# Altium PCB PCB_monitoring_Bott_Back.PcbDoc
Units mm, origin at the board's own origin, x right, y up, seen from the top; angles counter-clockwise.
Board outline 180 x 42.5 mm, 2 copper layers (Top Layer, Bottom Layer), stack 1.571 mm thick; 33 components, 80 nets, 198 pads, 3 vias.
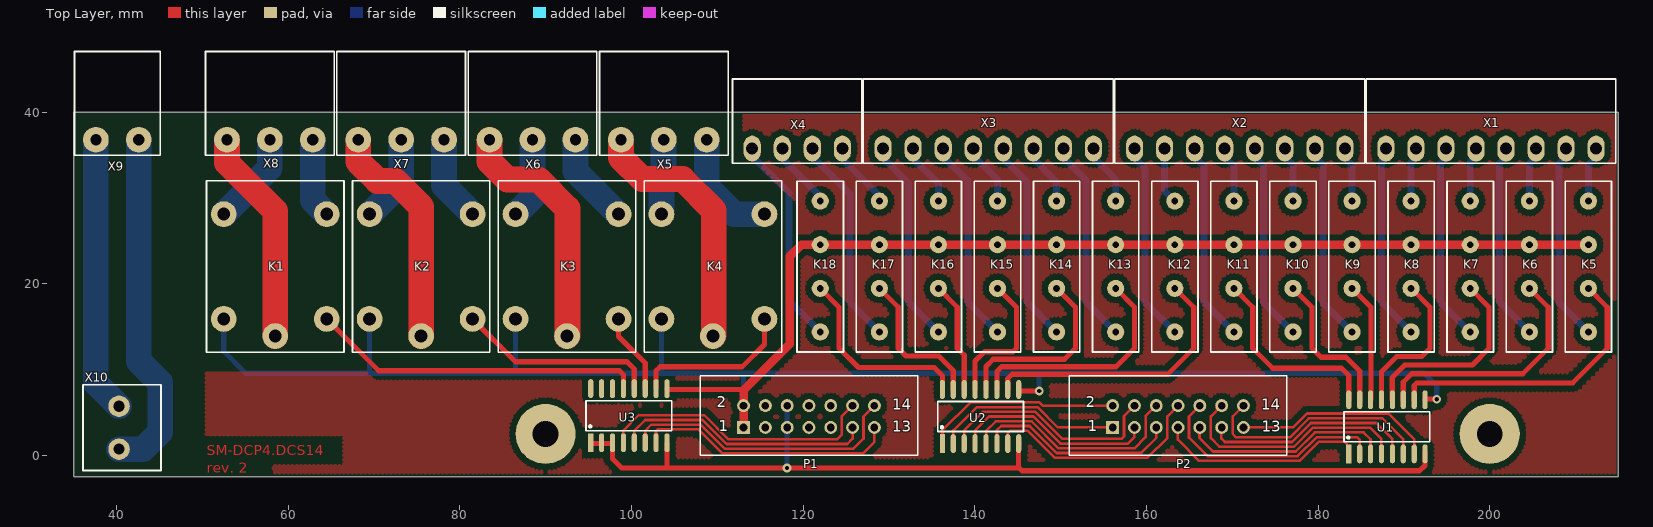
[diagram p0: Top Layer view]
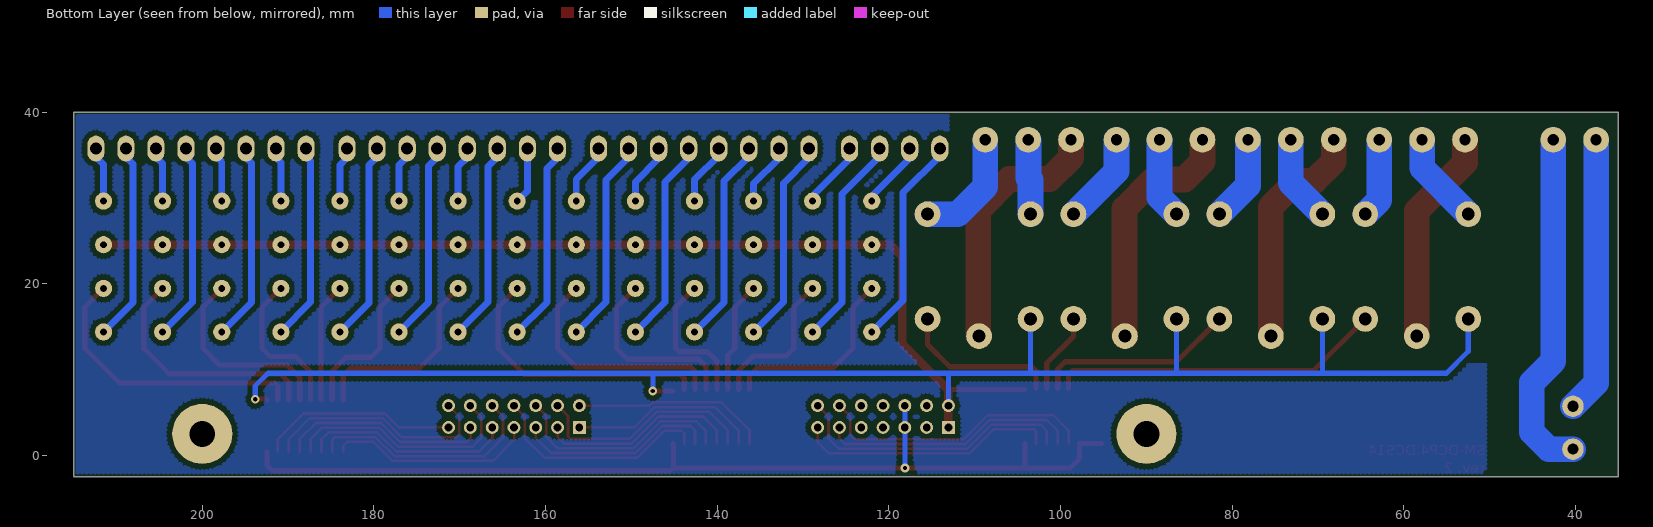
[diagram p1: Bottom Layer view, seen from below]

## Layer stack, top to bottom
Top Solder: solder mask 0.0102, Solder Resist, Dk 3.5
Top Layer: signal copper 0.0356
Dielectric 1: dielectric 1.5, FR-4, Dk 4.8
Bottom Layer: signal copper 0.0356
Bottom Solder: solder mask 0.0102, Solder Resist, Dk 3.5

## Board outline
35,-2.5 215,-2.5 215,40 35,40

## Design rules (kind name [scope] priority, off if disabled: settings)
Clearance Clearance_3 [InPolygon And InNetClass('GND')] p1: gap=0.4
Clearance Clearance_2 [InPolygon And OnLayer('Bottom Layer')] p2: gap=0.6
Clearance Clearance_1 [InPolygon And OnLayer('Top Layer')] p3: gap=0.7
Clearance [All] p4: gap=0.25
ComponentClearance [All] p1: gap=0 collisioncheckmode=3 verticalgap=0 showdistances=FALSE
Height [All] p1: minheight=0 maxheight=30 prefheight=12.7
HoleSize [All] p1: absolutevalues=TRUE maxlimit=5 minlimit=0.2 maxpercent=80.000 minpercent=20.000
HoleToHoleClearance [All] p1: gap=0.25 allowstackedmicrovias=TRUE
MinimumSolderMaskSliver [All] p1: minsoldermaskwidth=0
PlaneClearance [All] p1: clearance=0.5
PlaneConnect [All] p1: planeconnectstyle=Relief reliefexpansion=0.5 reliefentries=4 reliefconductorwidth=0.3 reliefairgap=0.25
PolygonConnect [All] p1: connectstyle=Relief reliefconductorwidth=0.4 reliefentries=4 polygonreliefangle="90 Angle" airgapwidth=0.4
RoutingCorners [All] p1: cornerstyle=45-Degree minsetback=2 maxsetback=2
RoutingVias [All] p1: holewidth=0.8 width=1.3 viastyle="Through Hole" minholewidth=0.3 minwidth=0.8 maxholewidth=5 maxwidth=7
SilkToBoardRegionClearance [All] p1 off:
SilkToSilkClearance [All] p1: silktosilkclearance=0
SilkToSolderMaskClearance [IsPad] p1: minsilkscreentomaskgap=0 clearancetoexposedcopper=TRUE
SolderMaskExpansion [All] p1: expansion=0.1
Width [All] p1: maxlimit=4 minlimit=0.25 preferedwidth=0.5 minimp=50.000000 maximp=50.000000 favimp=50.000000
19 further rules are at their usual default settings.

## Components (designator, comment, footprint, x,y, rotation, side; value= is the part's Value field where it differs from the comment)
K1 "JQC-3F-DC12VH-15A" BS-115C-12A 58.5,22 r90 top
K2 "JQC-3F-DC12VH-15A" BS-115C-12A 75.5,22 r90 top
K3 "JQC-3F-DC12VH-15A" BS-115C-12A 92.5,22 r90 top
K4 "JQC-3F-DC12VH-15A" BS-115C-12A 109.5,22 r90 top
K5 "BRS-1A12" R_BRS 211.5,22 r270 top
K6 "BRS-1A12" R_BRS 204.615,22 r270 top
K7 "BRS-1A12" R_BRS 197.731,22 r270 top
K8 "BRS-1A12" R_BRS 190.846,22 r270 top
K9 "BRS-1A12" R_BRS 183.962,22 r270 top
K10 "BRS-1A12" R_BRS 177.077,22 r270 top
K11 "BRS-1A12" R_BRS 170.192,22 r270 top
K12 "BRS-1A12" R_BRS 163.308,22 r270 top
K13 "BRS-1A12" R_BRS 156.423,22 r270 top
K14 "BRS-1A12" R_BRS 149.538,22 r270 top
K15 "BRS-1A12" R_BRS 142.654,22 r270 top
K16 "BRS-1A12" R_BRS 135.769,22 r270 top
K17 "BRS-1A12" R_BRS 128.885,22 r270 top
K18 "BRS-1A12" R_BRS 122,22 r270 top
P1 "BH-14" BH-14 120.686,4.524 r0 top
P2 "BH-14" BH-14 163.686,4.524 r0 top
U1 "ULN2003A" SO-16_N 188.025,3.325 r90 top
U2 "ULN2003A" SO-16_N 140.675,4.525 r90 top
U3 "ULN2003A" SO-16_N 99.7,4.625 r90 top
X1 "15EDGRC-3.5-08P" MC_3.5_8 200.15,35.75 r180 top
X2 "15EDGRC-3.5-08P" MC_3.5_8 170.875,35.75 r180 top
X3 "15EDGRC-3.5-08P" MC_3.5_8 141.575,35.75 r180 top
X4 "15EDGRC-3.5-04P" MC_3.5_4 119.325,35.75 r180 top
X5 "2EDGR-5.0-03P" 2EDGR-5.0-03P 103.775,36.775 r0 top
X6 "2EDGR-5.0-03P" 2EDGR-5.0-03P 88.475,36.775 r0 top
X7 "2EDGR-5.0-03P" 2EDGR-5.0-03P 73.175,36.775 r0 top
X8 "2EDGR-5.0-03P" 2EDGR-5.0-03P 57.875,36.775 r0 top
X9 "2EDGR-5.0-02P" 2EDGR-5.0-02P 40.1,36.775 r0 top
X10 "DG300" "5mm 2" 40.3,3.225 r270 top

## Footprints (in the part's own frame and the unit in brackets; to place one, negate y for a bottom-side part, rotate by r counter-clockwise, add the part's x,y. Pads: shape width x height; smd on the part's side, far side on the other; paste and mask are expansions set on the pad)
2EDGR-5.0-02P [mm]
  round 3 hole 1.3: 1(-2.5,0) 2(2.5,0)
  silkscreen extent -5,-1.82 5,10.28, body extent -5,-1.75 5,10.25, height 8.47
2EDGR-5.0-03P [mm]
  round 3 hole 1.3: 1(-5,0) 2(0,0) 3(5,0)
  silkscreen extent -7.5,-1.82 7.5,10.28, body extent -7.5,-1.75 7.5,10.25, height 8.47
"5mm 2" [mm]
  round 2.5 hole 1.3: 1(-2.5,0) 2(2.5,0)
  silkscreen extent -5,-4.2 5,4.9, body extent -5,-4 5,5, height 12.6
BH-14 [mm] "Connector IDC"
  rect 1.5x1.5 hole 0.9: 1(-7.62,-1.27)
  round 1.5 hole 0.9: 2(-7.62,1.27) 3(-5.08,-1.27) 4(-5.08,1.27) 5(-2.54,-1.27) 6(-2.54,1.27) 7(0,-1.27) 8(0,1.27) 9(2.54,-1.27) 10(2.54,1.27) 11(5.08,-1.27) 12(5.08,1.27) 13(7.62,-1.27) 14(7.62,1.27)
  silkscreen extent -12.68,-4.5 12.68,4.75, body extent -12.69,-4.4 12.69,4.7, height 9.3
BS-115C-12A [mm]
  round 3 hole 1.5: 1(-6.1,6) 2(-6.1,-6) 3(-8.1,0) 4(6.1,6) 5(6.1,-6)
  silkscreen extent -10,-8 10,8, body extent -9.75,-7.95 9.75,7.95, height 15
MC_3.5_4 [mm]
  oval 2x3 hole 1.4: 1(-5.25,0) 2(-1.75,0) 3(1.75,0) 4(5.25,0)
  silkscreen extent -7.55,-8.1 7.55,1.7, body extent -7.4,-8 7.4,1.2, height 7.2
MC_3.5_8 [mm]
  oval 2x3 hole 1.4: 1(-12.25,0) 2(-8.75,0) 3(-5.25,0) 4(-1.75,0) 5(1.75,0) 6(5.25,0) 7(8.75,0) 8(12.25,0)
  silkscreen extent -14.55,-8.1 14.55,1.7, body extent -14.4,-7.95 14.4,1.25, height 7.2
R_BRS [mm]
  round 2 hole 0.8: 1(-7.62,0) 3(-2.54,0) 5(2.54,0) 7(7.62,0)
  silkscreen extent -9.95,-2.7 9.95,2.7, body extent -9.52,-2.56 9.53,2.55, height 7.8
SO-16_N [mm] "16-Pin Small Outline Integrated Circuit 1.27 mm Pitch, IPC Medium Density"
  rect 2.2x0.6 smd: 1(-3.15,4.445)
  oval 2.2x0.6 smd: 2(-3.15,3.175) 3(-3.15,1.905) 4(-3.15,0.635) 5(-3.15,-0.635) 6(-3.15,-1.905) 7(-3.15,-3.175) 8(-3.15,-4.445) 9(3.15,-4.445) 10(3.15,-3.175) 11(3.15,-1.905) 12(3.15,-0.635) 13(3.15,0.635) 14(3.15,1.905) 15(3.15,3.175) 16(3.15,4.445)
  silkscreen extent -1.75,-5 1.75,5, body extent -3,-5.1 3,5.1, height 1.7

## Part data
K1 K2 K3 K4: library part JQC-3F-DC12VH-7A, "7A 240Vac 1 pole Slim relay"
K5 K6 K7 K8 K9 K10 K11 K12 K13 K14 K15 K16 K17 K18: "1A, 10Vdc, 1 pole, SIP terminal"
P1 P2: "IDC/BH"
U1 U2 U3: "Darlington Transistor Arrays"
X1 X2 X3: library part MC_3.5_8, "Connector 3.5mm"
X4: library part MC_3.5_4, "Connector 3.5mm"
X5 X6 X7 X8 X9: "Connector 5mm"
X10: library part DG300_2pin, "Connector 5mm"

## Free pads (board coordinates)
  round 7 hole 3: 0(90,2.5) 0(200,2.5)

## Via types
v1: diameter 1, hole 0.5, Top Layer to Bottom Layer, 3 vias

## Nets (pads, with @x,y where several pads share a name; then routed paths per layer and width w, separated by ;. In a path a pad name is that pad's centre, name@x,y a point inside that pad or via, vN(x,y) a via of type N, cw(c..) or ccw(c..) an arc to the next point about the centre after c; other vN are vias at no path point)
12V_B: K1.1 K2.1 K3.1 K4.1 K5.3 K6.3 K7.3 K8.3 K9.3 K10.3 K11.3 K12.3 K13.3 K14.3 K15.3 K16.3 K17.3 K18.3 P1.1 P1.2 U1.9 U2.9 U3.9 | length 301.8
  Top Layer w0.6: U3.9@104.131,7.674 113.066,7.674 113.066,7.591 ; U2.9@145.15,7.5 v1(147.5,7.5) ; U1.9 192.545,6.55 v1(193.825,6.55)
  Top Layer w1: P1.1 P1.2 113.066,7.591 118.45,12.975 118.45,23.2 119.775,24.525 121.985,24.525 K18.3 K17.3 K16.3 K15.3 K14.3 K13.3 K12.3 K11.3 K10.3 K9.3 K8.3 K7.3 K6.3 K5.3
  Bottom Layer w0.6: K1.1 52.5,12.125 55.05,9.575 69.65,9.575 ; K2.1 69.5,9.725 69.65,9.575 ; K3.1 86.5,9.775 86.7,9.575 ; K4.1 103.5,9.575 ; P1.2 113.066,9.566 113.075,9.575 ; v1(147.5,7.5) 147.5,9.575 ; v1(193.825,6.55) 193.825,8.1 192.35,9.575 147.5,9.575 ; 69.65,9.575 86.7,9.575 ; 86.7,9.575 103.5,9.575 ; 103.5,9.575 113.075,9.575 ; 113.075,9.575 147.5,9.575
B_OPR1: P1.13 U3.7 | length 30.4
  Top Layer w0.3: U3.7@102.861,1.374 102.861,2.824 103.061,3.024 107.826,3.024 110.626,0.224 126.986,0.224 128.306,1.544 P1.13
B_OPR2: P1.14 U3.6 | length 33.2
  Top Layer w0.3: U3.6@101.591,1.374 101.591,2.854 102.311,3.574 108.054,3.574 110.854,0.774 125.861,0.774 127.036,1.949 127.036,4.524 P1.14
B_OPR3: P1.11 U3.5 | length 30.2
  Top Layer w0.3: U3.5@100.321,1.374 100.321,2.834 101.611,4.124 108.282,4.124 111.082,1.324 125.146,1.324 125.766,1.944 P1.11
B_OPR4: P1.12 U3.4 | length 33
  Top Layer w0.3: U3.4@99.051,1.374 99.051,2.889 100.836,4.674 108.509,4.674 111.309,1.874 123.961,1.874 124.486,2.399 124.486,4.514 P1.12
B_OSR1: P2.13 U1.7 | length 23.3
  Top Layer w0.3: P2.13 177.091,3.254 178.711,4.874 188.211,4.874 191.186,1.899 U1.7@191.186,0.424
B_OSR2: P2.14 U1.6 | length 27.2
  Top Layer w0.3: P2.14 170.061,4.549 170.061,2.499 170.456,2.104 176.719,2.104 178.939,4.324 187.486,4.324 189.916,1.894 U1.6@189.916,0.424
B_OSR3: P2.11 U1.5 | length 24.6
  Top Layer w0.3: P2.11 168.736,3.224 168.736,1.949 169.131,1.554 176.947,1.554 179.167,3.774 186.761,3.774 188.646,1.889 U1.5@188.646,0.424
B_OSR4: P2.12 U1.4 | length 27.5
  Top Layer w0.3: P2.12 167.511,4.539 167.511,1.999 168.506,1.004 177.174,1.004 179.394,3.224 186.036,3.224 187.376,1.884 U1.4@187.376,0.424
B_OSR5: P2.9 U1.3 | length 24.5
  Top Layer w0.3: P2.9 166.186,3.214 166.186,2.049 167.781,0.454 177.402,0.454 179.622,2.674 185.311,2.674 186.106,1.879 U1.3@186.106,0.424
B_OSR6: P2.10 U1.2 | length 27.5
  Top Layer w0.3: P2.10 164.961,4.529 164.961,2.074 167.131,-0.096 177.63,-0.096 179.85,2.124 184.536,2.124 184.836,1.824 U1.2@184.836,0.424
B_OSR7: P2.7 U1.1 | length 24.2
  Top Layer w0.3: P2.7 163.661,3.229 163.661,1.824 166.131,-0.646 177.858,-0.646 180.078,1.574 183.111,1.574 183.566,1.119 U1.1@183.566,0.424
B_OSR8: P2.8 U2.7 | length 26.4
  Top Layer w0.3: U2.7@143.861,1.374 143.861,2.599 144.137,2.875 146.16,2.875 149.311,-0.276 160.111,-0.276 162.436,2.049 162.436,4.544 P2.8
B_OSR9: P2.5 U2.6 | length 23.6
  Top Layer w0.3: U2.6@142.591,1.374 142.591,2.929 143.087,3.425 146.388,3.425 149.539,0.274 159.386,0.274 161.146,2.034 P2.5
B_OSR10: P2.6 U2.5 | length 26.5
  Top Layer w0.3: U2.5@141.321,1.374 141.321,2.834 142.462,3.975 146.616,3.975 149.767,0.824 158.611,0.824 159.911,2.124 159.911,4.559 P2.6
B_OSR11: P2.3 U2.4 | length 23.5
  Top Layer w0.3: U2.4@140.051,1.374 140.051,2.889 141.687,4.525 146.843,4.525 149.994,1.374 157.836,1.374 158.586,2.124 158.586,3.234 P2.3
B_OSR12: P2.4 U2.3 | length 26.6
  Top Layer w0.3: U2.3@138.781,1.374 138.781,2.944 140.912,5.075 147.071,5.075 150.222,1.924 157.086,1.924 157.386,2.224 157.386,4.574 P2.4
B_OSR13: P2.1 U2.2 | length 22.2
  Top Layer w0.3: U2.2@137.511,1.374 137.511,2.899 140.237,5.625 147.299,5.625 149.67,3.254 P2.1
B_OSR14: P2.2 U2.1 | length 22.9
  Top Layer w0.3: U2.1@136.241,1.374 136.241,2.929 139.487,6.175 147.527,6.175 147.908,5.794 P2.2
C_OPR1: K4.2 U3.10 | length 18.9
  Top Layer w0.6: U3.10 102.875,9.85 103.35,10.325 112.9,10.325 115.5,12.925 K4.2
C_OPR2: K3.2 U3.11 | length 9.4
  Top Layer w0.6: K3.2 98.5,13.85 101.605,10.745 U3.11
C_OPR3: K2.2 U3.12 | length 23.5
  Top Layer w0.6: K2.2 86.5,10.9 99.5,10.9 100.335,10.065 U3.12
C_OPR4: K1.2 U3.13 | length 38.9
  Top Layer w0.6: K1.2 70.55,9.85 98.625,9.85 99.075,9.4 99.065,9.39 U3.13
C_OSR1: K5.5 U1.10 | length 33.9
  Top Layer w0.6: U1.10 191.2,8.15 191.5,8.45 209.675,8.45 213.7,12.475 213.7,17.26 K5.5
C_OSR2: K6.5 U1.11 | length 28.5
  Top Layer w0.6: U1.11 189.925,6.48 189.925,8.525 190.9,9.5 203.84,9.5 206.815,12.475 206.815,17.26 K6.5
C_OSR3: K7.5 U1.12 | length 23.2
  Top Layer w0.6: U1.12 188.65,6.485 188.65,9.075 190.1,10.525 197.981,10.525 199.931,12.475 199.931,17.26 K7.5
C_OSR4: K8.5 U1.13 | length 18
  Top Layer w0.6: U1.13 187.39,9.74 189.15,11.5 192.071,11.5 193.046,12.475 193.046,17.26 K8.5
C_OSR5: K9.5 U1.14 | length 13.9
  Top Layer w0.6: K9.5 186.162,17.26 186.162,6.517 U1.14
C_OSR6: K10.5 U1.15 | length 17.9
  Top Layer w0.6: K10.5 179.277,17.26 179.277,12.475 180.327,11.425 183.25,11.425 184.85,9.825 U1.15
C_OSR7: K11.5 U1.16 | length 23.2
  Top Layer w0.6: K11.5 172.392,17.26 172.392,12.475 174.717,10.15 182.725,10.15 183.58,9.295 U1.16
C_OSR8: K12.5 U2.10 | length 32.3
  Top Layer w0.6: U2.10 143.85,8.95 144.35,9.45 162.483,9.45 165.508,12.475 165.508,17.26 K12.5
C_OSR9: K13.5 U2.11 | length 27.2
  Top Layer w0.6: U2.11 142.58,9.78 143.125,10.325 156.473,10.325 158.623,12.475 158.623,17.26 K13.5
C_OSR10: K14.5 U2.12 | length 21.9
  Top Layer w0.6: U2.12 141.31,10.36 142.15,11.2 150.463,11.2 151.738,12.475 151.738,17.26 K14.5
C_OSR11: K15.5 U2.13 | length 16.6
  Top Layer w0.6: U2.13 140.04,10.99 141.125,12.075 144.454,12.075 144.854,12.475 144.854,17.26 K15.5
C_OSR12: K16.5 U2.14 | length 13
  Top Layer w0.6: K16.5 137.969,17.26 137.969,12.475 138.77,11.674 U2.14
C_OSR13: K17.5 U2.15 | length 17.6
  Top Layer w0.6: K17.5 131.085,17.26 131.085,12.475 131.985,11.575 135.8,11.575 137.5,9.875 U2.15
C_OSR14: K18.5 U2.16 | length 22.8
  Top Layer w0.6: K18.5 124.2,17.26 124.2,12.475 126.45,10.225 135.275,10.225 136.23,9.27 U2.16
GND_B: P1.5 P1.6 U1.8 U2.8 U3.1 U3.2 U3.3 U3.8 | length 114.4
  Top Layer w0.6: U3.1@95.241,1.374 97.781,1.374 97.781,-0.396 98.861,-1.476 104.136,-1.476 ; U3.8@104.131,1.374 104.136,1.369 104.136,-1.476 ; 145.111,-1.476 104.136,-1.476 ; U2.8@145.131,1.374 145.111,1.354 145.111,-1.411 145.5,-1.8 191.825,-1.8 192.456,-1.169 U1.8@192.456,0.424
  Bottom Layer w0.6: v1@118.146,-1.475 P1.5 P1.6
  other v1: 118.125,-1.475
NetK1_3: K1.3 X8.1 | length 25.2
  Top Layer w3: X8.1 52.875,34.1 58.5,28.475 K1.3
NetK1_4: K1.4 X8.2 | length 10.9
  Bottom Layer w3: K1.4 57.875,33.475 X8.2
NetK1_5: K1.5 X8.3 | length 9.3
  Bottom Layer w3: X8.3 62.875,29.725 K1.5
NetK2_3: K2.3 X7.1 | length 27.1
  Top Layer w3: X7.1 68.175,34.225 70.425,31.975 72.5,31.975 75.5,28.975 K2.3
NetK2_4: K2.4 X7.2 | length 10.2
  Bottom Layer w3: K2.4 73.175,31.775 X7.2
NetK2_5: K2.5 X7.3 | length 10.1
  Bottom Layer w3: X7.3 78.175,31.425 K2.5
NetK3_3: K3.3 X6.1 | length 28.8
  Top Layer w3: X6.1 83.475,34.225 85.55,32.15 89.15,32.15 92.55,28.75 92.55,13.95 K3.3
NetK3_4: K3.4 X6.2 | length 9.5
  Bottom Layer w3: K3.4 88.475,30.075 X6.2
NetK3_5: K3.5 X6.3 | length 10.8
  Bottom Layer w3: X6.3 93.475,33.125 K3.5
NetK4_3: K4.3 X5.1 | length 30.2
  Top Layer w3: X5.1 98.775,34.675 101.25,32.2 105.95,32.2 109.6,28.55 109.6,14 K4.3
NetK4_4: K4.4 X5.2 | length 8.8
  Bottom Layer w3: K4.4 103.5,32.1 103.725,32.325 103.725,36.725 X5.2
NetK4_5: K4.5 X5.3 | length 13.5
  Bottom Layer w3: X5.3 108.775,31.3 111.975,28.1 K4.5
NetK5_1: K5.1 X1.1 | length 6.5
  Bottom Layer w0.8: K5.1 211.5,33.875 212.4,34.775 X1.1
NetK5_7: K5.7 X1.2 | length 23.1
  Bottom Layer w0.8: X1.2 208.85,35.7 208.85,34.725 208.075,33.95 208.075,17.805 K5.7
NetK6_1: K6.1 X1.3 | length 6.5
  Bottom Layer w0.8: K6.1 204.615,33.99 205.4,34.775 X1.3
NetK6_7: K6.7 X1.4 | length 23.1
  Bottom Layer w0.8: X1.4 201.9,34.75 201.15,34 201.15,17.845 K6.7
NetK7_1: K7.1 X1.5 | length 6.4
  Bottom Layer w0.8: K7.1 197.731,34.156 198.4,34.825 X1.5
NetK7_7: K7.7 X1.6 | length 23.1
  Bottom Layer w0.8: X1.6 194.9,34.7 194.275,34.075 194.275,17.836 K7.7
NetK8_1: K8.1 X1.7 | length 6.4
  Bottom Layer w0.8: K8.1 190.846,34.121 191.4,34.675 X1.7
NetK8_7: K8.7 X1.8 | length 23
  Bottom Layer w0.8: X1.8 187.9,34.8 187.375,34.275 187.375,17.851 K8.7
NetK9_1: K9.1 X2.1 | length 6.5
  Bottom Layer w0.8: X2.1 183.125,34.675 183.962,33.838 K9.1
NetK9_7: K9.7 X2.2 | length 23.2
  Bottom Layer w0.8: X2.2 179.625,34.775 180.575,33.825 180.575,17.767 K9.7
NetK10_1: K10.1 X2.3 | length 6.5
  Bottom Layer w0.8: X2.3 176.125,34.775 177.077,33.823 K10.1
NetK10_7: K10.7 X2.4 | length 23.2
  Bottom Layer w0.8: X2.4 172.625,34.7 173.625,33.7 173.625,17.832 K10.7
NetK11_1: K11.1 X2.5 | length 6.6
  Bottom Layer w0.8: X2.5 169.125,34.7 170.192,33.633 K11.1
NetK11_7: K11.7 X2.6 | length 23.3
  Bottom Layer w0.8: X2.6 165.625,34.75 166.725,33.65 166.725,17.847 K11.7
NetK12_1: K12.1 X2.7 | length 6.6
  Bottom Layer w0.8: X2.7 162.125,30.803 K12.1
NetK12_7: K12.7 X2.8 | length 23.3
  Bottom Layer w0.8: X2.8 158.625,34.65 159.85,33.425 159.85,17.838 K12.7
NetK13_1: K13.1 X3.1 | length 7.2
  Bottom Layer w0.8: X3.1 153.825,34.775 156.423,32.177 K13.1
NetK13_7: K13.7 X3.2 | length 23.9
  Bottom Layer w0.8: X3.2 150.325,34.725 152.95,32.1 152.95,17.853 K13.7
NetK14_1: K14.1 X3.3 | length 7.3
  Bottom Layer w0.8: X3.3 146.825,34.575 149.538,31.862 K14.1
NetK14_7: K14.7 X3.4 | length 23.9
  Bottom Layer w0.8: X3.4 143.325,34.575 146.075,31.825 146.075,17.843 K14.7
NetK15_1: K15.1 X3.5 | length 7.3
  Bottom Layer w0.8: X3.5 139.825,34.95 142.654,32.121 K15.1
NetK15_7: K15.7 X3.6 | length 24
  Bottom Layer w0.8: X3.6 136.325,34.825 139.2,31.95 139.2,17.834 K15.7
NetK16_1: K16.1 X3.7 | length 7.3
  Bottom Layer w0.8: X3.7 132.825,34.6 135.769,31.656 K16.1
NetK16_7: K16.7 X3.8 | length 24
  Bottom Layer w0.8: X3.8 129.325,34.675 132.3,31.7 132.3,17.849 K16.7
NetK17_1: K17.1 X4.1 | length 7.9
  Bottom Layer w0.8: X4.1 124.575,34.55 128.885,30.24 K17.1
NetK17_7: K17.7 X4.2 | length 24.6
  Bottom Layer w0.8: X4.2 121.075,34.825 125.45,30.45 125.45,17.815 K17.7
NetK18_1: K18.1 X4.3 | length 8
  Bottom Layer w0.8: X4.3 117.575,34.6 122,30.175 K18.1
NetK18_7: K18.7 X4.4 | length 24.7
  Bottom Layer w0.8: X4.4 114.075,34.9 118.35,30.625 118.35,18.03 K18.7
NetX9_1: X9.1 X10.1 | length 32.2
  Bottom Layer w3: X9.1 37.6,8.425 X10.1
NetX9_2: X9.2 X10.2 | length 40.7
  Bottom Layer w3: X10.2 43.1,0.725 45.1,2.725 45.1,8.475 42.6,10.975 X9.2
pads on no net: P1.3 P1.4 P1.7 P1.8 P1.9 P1.10 U3.14 U3.15 U3.16

## Polygon pours and split planes (outlines as drawn)
no net on Top Layer "polygon_fill" (hatched 90Degree grid 0.5 track 0.5, pour order 3): 50.5,-2 214.5,-2 214.5,39.5 113.125,39.5 113.125,35.75 119.5,29.375 119.5,24 119.5,13.5 116,9.5 50.5,9.5
no net on Bottom Layer "polygon_fill" (hatched 90Degree grid 0.5 track 0.5, pour order 4): 50.5,-2 214.5,-2 214.5,39.5 113.125,39.5 113.125,35.75 119.5,29.375 119.5,24 119.5,13.5 116.5,10.5 50.5,10.5

## Other copper
Top Layer:
  text "SM-DCP4.DCS14" at 50.5,0 h1.2
  text "rev. 2" at 50.5,-2 h1.2

## Silkscreen, mask and mechanical layers (free items; w line width, h text height)
Mechanical 3:
  the board outline again, w0.2

## Text inside footprints (layer, text, board x,y; h text height)
P1: Top Overlay "14" at 130.391,5.324 h1.27; Top Overlay "13" at 130.416,2.724 h1.27; Top Overlay "2" at 109.956,5.624 h1.27; Top Overlay "1" at 110.156,2.824 h1.27
P2: Top Overlay "14" at 173.391,5.324 h1.27; Top Overlay "13" at 173.416,2.724 h1.27; Top Overlay "2" at 152.956,5.624 h1.27; Top Overlay "1" at 153.156,2.824 h1.27